# Allegro board ee174tutorial.brd
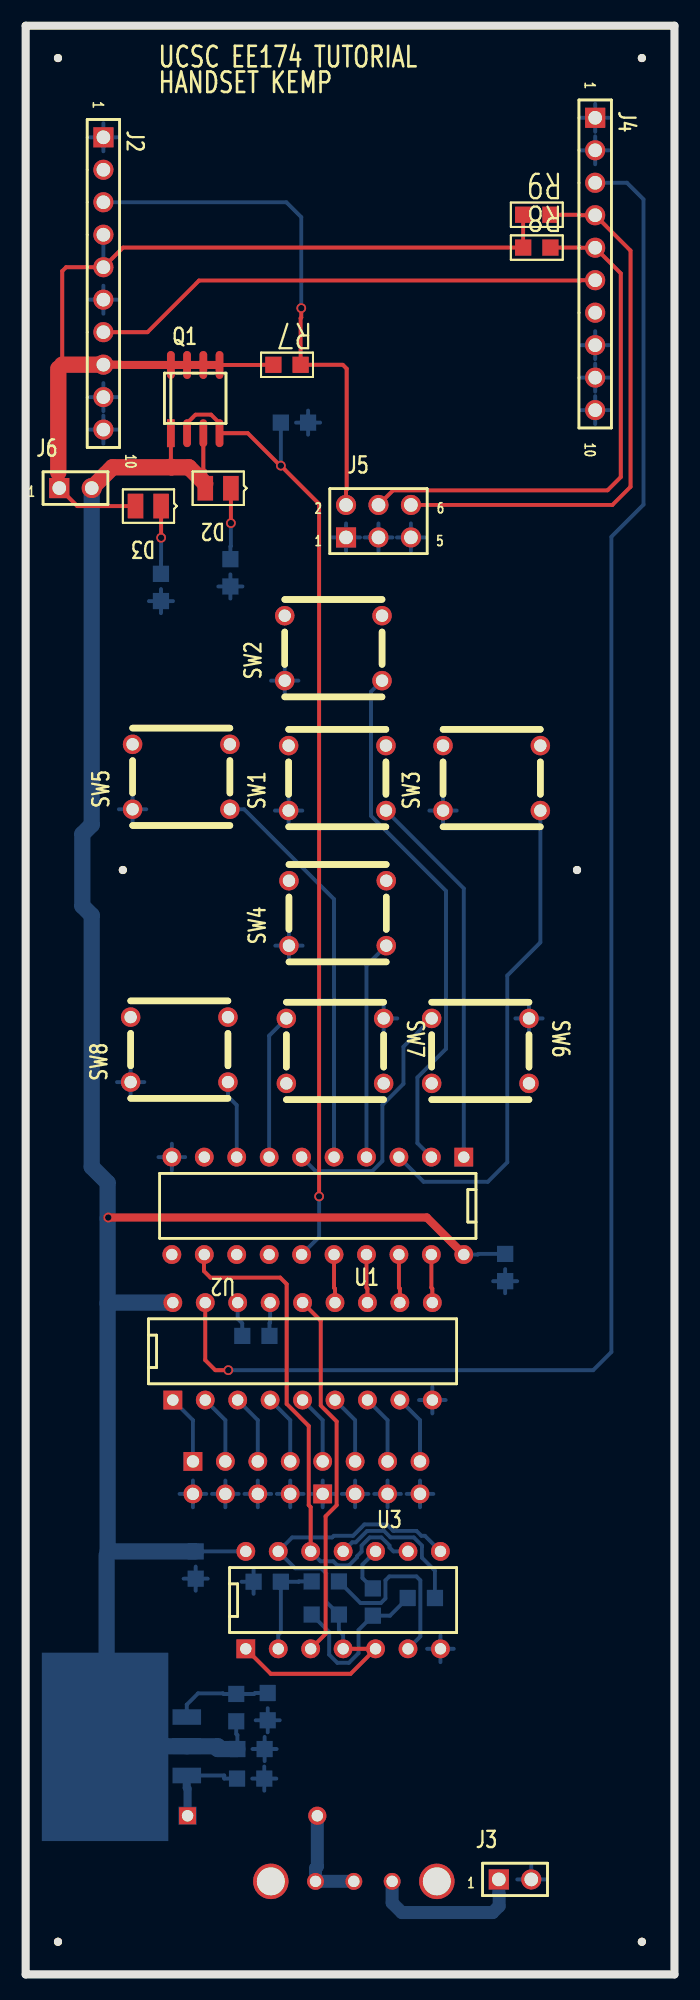
[diagram p0: board, top side]
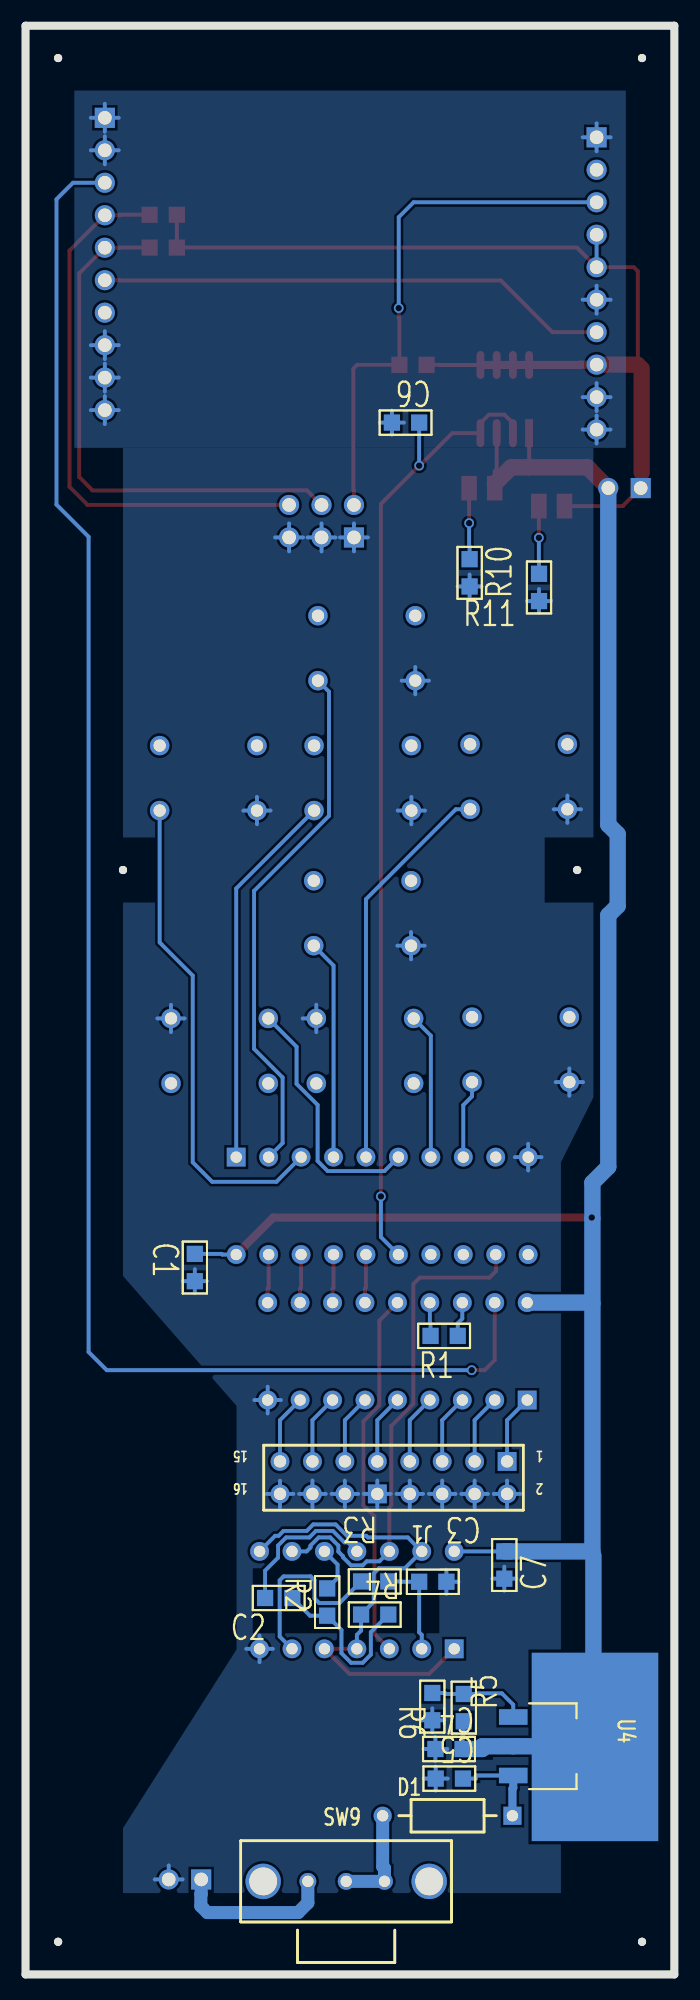
[diagram p1: board, bottom side, seen from below]

Outline 50.81 x 152.41 mm; copper layers: TOP, BOTTOM. Coordinates in mm from the lower left corner of the outline.
Outline path: 0,152.41 0,0.01 50.8,0.01 50.8,152.41 0,152.41 ; 0.01,152.4 0.01,0 50.81,0 50.81,152.4 0.01,152.4

## Placement (name value [footprint] x y rotation side)
C1  0.1uF  [SMC0805]  37.55 56.35 270 bottom
C2  100nF  [SMC0805]  32.05 29.44 180 bottom
C3  0.1uF  [SMC0805]  17.86 30.71 0 bottom
C4  0.1uF  [SMC0805]  16.59 17.63 0 bottom
C5  0.1uF  [SMC0805]  16.56 15.32 0 bottom
C6  10nF  [SMC0805]  19.99 121.36 0 bottom
C7  0.1uF  [SMC0805]  13.32 30.95 90 bottom
D1  1N5818  [AX400_35D]  22.85 12.41 180 bottom
D2  GREEN  [SMD_0805_21]  14.07 116.23 180 top
D3  RED  [SMD_0805_21]  8.61 114.83 180 top
J1  JUMPER8  [BCON_8X2V_100S_1SQ_42D]  13.11 40.12 0 bottom
J2  10Pin 1Row Header  [BCON_10X1V_100S_1SQ_42D]  6.1 143.68 270 top
J3  +9V Battery  [BCON_2X1V_100S_1SQ_42D]  37.06 7.43 0 top
J4  10Pin 1Row Header  [BCON_10X1V_100S_1SQ_42D]  44.6 145.2 270 top
J5  JUMPER3  [BCON_3X2V_100S_42D]  25.1 112.38 0 top
J6  TX Test Jumper  [BCON_2X1V_100S_1SQ_42D]  2.64 116.24 0 top
NOREF  -  [unnamed]  43.18 86.37 180 bottom
NOREF#2  -  [unnamed]  48.26 2.55 180 bottom
NOREF#3  -  [unnamed]  7.62 86.37 180 bottom
NOREF#4  -  [unnamed]  2.54 2.55 180 bottom
NOREF#5  -  [unnamed]  2.54 149.87 180 bottom
NOREF#6  -  [unnamed]  48.26 149.87 180 bottom
Q1  TPS1120  [SOJ50_8_WB150_L150]  11.38 120.54 0 top
R1  1M  [SMR0805]  19.1 49.94 180 bottom
R2  4.7k  [SMR0805]  27.19 30.19 270 bottom
R3  470  [SMR0805]  22.4 30.73 0 bottom
R4  120k  [SMR0805]  22.4 28.14 0 bottom
R5  R  [SMR0805]  18.96 19.88 90 bottom
R6  240  [SMR0805]  16.5 21.93 270 bottom
R7  47k  [SMR0805]  21.54 125.88 180 top
R8  47k  [SMR0805]  41.1 135.05 180 top
R9  47k  [SMR0805]  41.1 137.62 180 top
R10  1k  [SMR0805]  16.04 108.55 90 bottom
R11  1k  [SMR0805]  10.6 109.54 270 bottom
SW1  SW PUSHBUTTON  [B3F-1000_38D]  28.22 91.02 90 top
SW2  SW PUSHBUTTON  [B3F-1000_38D]  27.91 101.18 90 top
SW3  SW PUSHBUTTON  [B3F-1000_38D]  40.31 91.02 90 top
SW4  SW PUSHBUTTON  [B3F-1000_38D]  28.24 80.45 90 top
SW5  SW PUSHBUTTON  [B3F-1000_38D]  16 91.12 90 top
SW6  SW PUSHBUTTON  [B3F-1000_38D]  31.8 74.76 270 top
SW7  SW PUSHBUTTON  [B3F-1000_38D]  20.42 74.76 270 top
SW8  SW PUSHBUTTON  [B3F-1000_38D]  15.85 69.79 90 top
SW9  SW_SL_SPDT  [SPDT_EG1206]  25.7 7.28 180 bottom
U1  HT12E  [DIP100_18_W300_L950]  11.53 44.92 0 top
U2  ATF16V8BQL  [DIP100_20_W300_L975]  34.32 63.92 180 top
U3  74HC00  [DIP100_14_W300_L700]  17.25 25.46 0 top
U4  LM317A/SOT223  [SMSOT223_1234]  12.62 20.13 270 bottom

## Library data of the parts
C1-C7 = C NP_1
D1 = DIODE SCHOTTKY_0
D2 D3 = LED_0
J1 = JUMPER8
J2 J4 = 10Pin 1Row Header
J3 J6 = 2Pin Header_0
J5 = JUMPER3
Q1 = TPS1120_1
R1-R11 = R
SW1-SW8 = SW PUSHBUTTON
SW9 = SW_SL_SPDT_0
U1 = HT12E_4
U2 = ATF16V8BQL_3
U3 = 74HC00_8
U4 = LM317_1

## Footprints (pads in the part's own frame, mm; a bottom-side part is the same pattern mirrored in y, then rotated)
AX400_35D
  round 1.422 hole 0.889: 1(0,0)
  rect 1.321x1.321 hole 0.889: 2(10.16,0)
B3F-1000_38D
  round 1.524 hole 0.965: (5.08,7.62) (5.08,0) 1(0,7.62) 2(0,0)
BCON_2X1V_100S_1SQ_42D
  rect 1.575x1.575 hole 1.067: 1(0,0)
  round 1.575 hole 1.067: 2(2.54,0)
BCON_3X2V_100S_42D
  rect 1.575x1.575 hole 1.067: 1(0,0)
  round 1.575 hole 1.067: 2(0,2.54) 3(2.54,0) 4(2.54,2.54) 5(5.08,0) 6(5.08,2.54)
BCON_8X2V_100S_1SQ_42D
  rect 1.473x1.473 hole 0.965: 1(0,0) 10(10.16,2.54)
  round 1.473 hole 0.965: 2(0,2.54) 3(2.54,0) 4(2.54,2.54) 5(5.08,0) 6(5.08,2.54) 7(7.62,0) 8(7.62,2.54) 9(10.16,0) 11(12.7,0) 12(12.7,2.54) 13(15.24,0) 14(15.24,2.54) 15(17.78,0) 16(17.78,2.54)
BCON_10X1V_100S_1SQ_42D
  rect 1.575x1.575 hole 1.067: 1(0,0)
  round 1.575 hole 1.067: 2(2.54,0) 3(5.08,0) 4(7.62,0) 5(10.16,0) 6(12.7,0) 7(15.24,0) 8(17.78,0) 9(20.32,0) 10(22.86,0)
DIP100_14_W300_L700
  rect 1.473x1.473 hole 0.889: 1(0,0)
  round 1.473 hole 0.889: 2(2.54,0) 3(5.08,0) 4(7.62,0) 5(10.16,0) 6(12.7,0) 7(15.24,0) 8(15.24,7.62) 9(12.7,7.62) 10(10.16,7.62) 11(7.62,7.62) 12(5.08,7.62) 13(2.54,7.62) 14(0,7.62)
DIP100_18_W300_L950
  rect 1.473x1.473 hole 0.889: 1(0,0)
  round 1.473 hole 0.889: 2(2.54,0) 3(5.08,0) 4(7.62,0) 5(10.16,0) 6(12.7,0) 7(15.24,0) 8(17.78,0) 9(20.32,0) 10(20.32,7.62) 11(17.78,7.62) 12(15.24,7.62) 13(12.7,7.62) 14(10.16,7.62) 15(7.62,7.62) 16(5.08,7.62) 17(2.54,7.62) 18(0,7.62)
DIP100_20_W300_L975
  rect 1.473x1.473 hole 0.889: 1(0,0)
  round 1.473 hole 0.889: 2(2.54,0) 3(5.08,0) 4(7.62,0) 5(10.16,0) 6(12.7,0) 7(15.24,0) 8(17.78,0) 9(20.32,0) 10(22.86,0) 11(22.86,7.62) 12(20.32,7.62) 13(17.78,7.62) 14(15.24,7.62) 15(12.7,7.62) 16(10.16,7.62) 17(7.62,7.62) 18(5.08,7.62) 19(2.54,7.62) 20(0,7.62)
SMC0805
  rect 1.27x1.27 smd: 1(0,0) 2(2.134,0)
SMD_0805_21
  rect 1.219x1.93 smd: 1(0,0) 2(-2.007,0)
SMR0805
  rect 1.27x1.27 smd: 1(0,0) 2(2.134,0)
SMSOT223_1234
  rect 1.219x2.235 smd: 1(0,0) 2(2.286,0) 3(4.572,0)
  rect 3.607x2.235 smd: 4(2.286,6.198)
SOJ50_8_WB150_L150
  rect 0.61x2.184 smd: 1(0,0)
  oval 0.61x2.184 smd: 2(1.27,0) 3(2.54,0) 4(3.81,0) 5(3.81,5.334) 6(2.54,5.334) 7(1.27,5.334) 8(0,5.334)
SPDT_EG1206
  round 2.769 hole 2.184: (-6.5,0) (6.5,0)
  round 1.321 hole 0.889: 1(-3,0) 2(0,0) 3(3,0)
unnamed
  round 0.635 hole 3.175 unplated: (0,0)

## Nets
+4.5V: C1.1(A) C4.1(A) C7.2(B) D2.1(ANODE) J6.2 Q1.1(S) Q1.3(S) R6.2(B) U1.18(+4.5V) U2.20(+4.5V) U3.14(+4.5V) U4.2(VOUT1) U4.4(VOUT2)
GND: C1.2(B) C3.1(A) C4.2(B) C5.2(B) C6.2(B) C7.1(A) J1.2 J1.4 J1.6 J1.8 J1.10 J1.12 J1.14 J1.16 J2.1 J2.6 J2.9 J2.10 J3.2 J4.1 J4.2 J4.8 J4.9 J4.10 J5.1 J5.3 J5.5 R5.1(A) R10.1(A) R11.2(B) SW1.1(A) SW2.1(A) SW3.1(A) SW4.1(A) SW5.1(A) SW6.1(A) SW7.1(A) SW8.1(A) U1.9(GND) U2.10(GND) U3.7(GND)
3HZ_CLK: U1.14(TE) U3.3(Y)
ADR0: J1.1 U1.1(A0)
ADR1: J1.3 U1.2(A1)
ADR2: J1.5 U1.3(A2)
ADR3: J1.7 U1.4(A3)
ADR4: J1.9 U1.5(A4)
ADR5: J1.11 U1.6(A5)
ADR6: J1.13 U1.7(A6)
ADR7: J1.15 U1.8(A7)
CLK_ENABLE: U2.12(ENABLE) U3.9(A) U3.12(A)
DATA: J4.3 U1.17(DOUT)
N_TXON: C6.1(A) Q1.2(G) Q1.4(G) U2.15(A)
S1: SW1.2(B) U2.1(I1)
S2: SW2.2(B) U2.2(I2)
S3: SW3.2(B) U2.3(I3)
S4: SW4.2(B) U2.4(I4)
S5: SW5.2(B) U2.5(I5)
S6: SW6.2(B) U2.6(I6)
S7: SW7.2(B) U2.7(I7)
S8: SW8.2(B) U2.8(I8)
N03546: J3.1 SW9.1
N03550: D1.1(ANODE) SW9.2 SW9.3
N03611: C5.1(A) D1.2(CATHODE) U4.3(VIN)
N03633: R5.2(B) R6.1(A) U4.1(ADJ)
N03682: D2.2(CATHODE) R10.2(B)
N03964: C2.2(B) R2.2(B) R4.1(A)
N03982: R4.2(B) U3.1(A) U3.4(A) U3.5(B) U3.8(Y) U3.13(B)
N04113: C3.2(B) R3.1(A) U3.2(B)
N06193: R1.2(B) U1.16(OSC1)
N06197: R1.1(A) U1.15(OSC2)
N11246: U1.10(A) U2.19(D0)
N11250: U1.11(B) U2.18(D1)
N11254: U1.12(C) U2.17(D2)
N11258: U1.13(D) U2.16(D3)
N11605: D3.1(ANODE) J2.4 J2.5 J2.8 J6.1 Q1.5(D2) Q1.6(D1) Q1.7(D2) Q1.8(D1) R7.2(B) R8.2(B) R9.2(B)
N11612: D3.2(CATHODE) R11.1(A)
N13941: J2.3 J5.2 R7.1(A)
N15925: J2.7 J4.6
N16601: J4.5 J5.4 R8.1(A)
N16605: J4.4 J5.6 R9.1(A)
N35450: R2.1(A) U3.10(B)
N35896: R3.2(B) U3.6(Y)
N35975: C2.1(A) U3.11(Y)

Pads without a net: J2 2; J4 7; U2 9 11 13 14

## Via types
v1: diameter 0.762, hole 0.508, TOP to BOTTOM, 7 vias

## Routing (per net, layer and track width the routed paths; a pad name or vN(x,y) marks a point on that pad's centre or on a via; arc(x,y) is an arc through that point)
+4.5V: length 169.7
  TOP w0.305: D2.1 14.07,117.55 13.92,117.7 Q1.3 ; Q1.1 11.38,117.92
  TOP w0.635: v1(6.48,59.19) 31.42,59.19 U2.20
  TOP w1.27: 11.43,117.87 6.81,117.87 J6.2 ; 11.43,117.87 11.38,117.92 ; 11.43,117.87 12.79,117.87 14.07,116.59
  BOTTOM w0.305: R6.2 16.5,18.81 16.59,18.72 C4.1 ; v1(6.48,59.19) 6.48,59.17 6.43,59.12 ; U2.20 35.41,56.3 35.46,56.35 C1.1 ; 6.35,32.78 6.65,33.08 ; U3.14 C7.2 ; U4.4 6.43,17.16
  BOTTOM w1.27: 6.35,22.87 6.35,32.78 ; 6.43,52.48 6.43,33.08 C7.2 ; 6.43,52.48 6.43,61.91 5.18,63.16 5.18,82.83 4.45,83.57 4.45,89.18 5.18,89.91 J6.2 ; 6.43,52.48 6.48,52.54 U1.18 ; C4.1 15.05,17.63 15.05,17.84 U4.2 10.16,17.84
GND: length 167.9
  BOTTOM w0.305: 30.81,44.92 U1.9 ; U1.9 31.85,45.96 ; U1.9 32.9,44.92 ; U1.9 31.85,43.88 ; 28.04,73.7 SW7.1 ; SW7.1 29.11,74.76 ; SW7.1 28.04,75.83 ; 44.6,123.78 J4.9 ; J4.9 43.51,124.88 ; J4.9 45.7,124.88 ; J4.9 44.6,125.97 ; 24.76,37.58 J1.12 ; J1.12 25.81,38.62 ; J1.12 25.81,36.54 ; J1.12 26.85,37.58 ; J1.10 24.31,37.58 ; J1.10 23.27,38.62 ; J1.10 22.22,37.58 ; J1.10 23.27,36.54 ; J2.10 7.19,120.82 ; J2.10 5,120.82 ; J2.10 6.1,121.91 ; J2.10 6.1,119.72 ; J2.6 7.19,130.98 ; J2.6 5,130.98 ; J2.6 6.1,132.07 ; J2.6 6.1,129.88 ; 5,123.36 J2.9 ; J2.9 6.1,124.45 ; J2.9 6.1,122.26 ; J2.9 7.19,123.36 ; 43.51,142.66 J4.2 ; J4.2 44.6,143.75 ; J4.2 44.6,141.56 ; J4.2 45.7,142.66 ; 7.16,69.79 SW8.1 ; SW8.1 9.3,69.79 ; SW8.1 8.23,68.72 ; SW8.1 8.23,70.86 ; C5.2 19.64,15.32 ; C5.2 18.69,16.26 ; C5.2 18.69,14.37 ; C5.2 17.75,15.32 ; C3.1 17.86,31.65 ; C3.1 16.91,30.71 ; C3.1 17.86,29.77 ; 31.62,91.02 SW3.1 ; SW3.1 33.76,91.02 ; SW3.1 32.69,89.95 ; SW3.1 32.69,92.09 ; SW5.1 8.38,92.19 ; SW5.1 8.38,90.05 ; SW5.1 7.31,91.12 ; SW5.1 9.45,91.12 ; 20.6,89.95 SW1.1 ; SW1.1 20.6,92.09 ; SW1.1 21.67,91.02 ; SW1.1 19.53,91.02 ; 11.46,62.88 U2.10 ; U2.10 10.41,63.92 ; U2.10 11.46,64.96 ; U2.10 12.5,63.92 ; C4.2 18.72,18.57 ; C4.2 18.72,16.69 ; C4.2 17.78,17.63 ; C4.2 19.66,17.63 ; C7.1 13.32,31.89 ; C7.1 13.32,30.01 ; C7.1 14.26,30.95 ; C7.1 12.38,30.95 ; 38.35,74.76 SW6.1 ; SW6.1 39.42,73.7 ; SW6.1 40.49,74.76 ; SW6.1 39.42,75.83 ; R5.1 18.96,20.82 ; R5.1 18.96,18.93 ; R5.1 18.02,19.88 ; R5.1 19.9,19.88 ; 22.12,120.42 C6.2 ; C6.2 23.07,121.36 ; C6.2 22.12,122.3 ; C6.2 21.18,121.36 ; 13.11,36.54 J1.2 ; J1.2 12.06,37.58 ; J1.2 14.15,37.58 ; J1.2 13.11,38.62 ; 20.73,36.54 J1.8 ; J1.8 19.68,37.58 ; J1.8 21.77,37.58 ; J1.8 20.73,38.62 ; 30.89,36.54 J1.16 ; J1.16 31.93,37.58 ; J1.16 30.89,38.62 ; J1.16 29.84,37.58 ; J5.3 28.73,112.38 ; J5.3 27.64,111.29 ; J5.3 26.54,112.38 ; J5.3 27.64,113.48 ; SW2.1 21.36,101.18 ; SW2.1 19.23,101.18 ; SW2.1 20.29,100.11 ; SW2.1 20.29,102.25 ; 44.6,144.1 J4.1 ; J4.1 44.6,146.29 ; J4.1 45.7,145.2 ; J4.1 43.51,145.2 ; 31.44,25.46 U3.7 ; U3.7 33.53,25.46 ; U3.7 32.49,26.51 ; U3.7 32.49,24.42 ; J4.8 45.7,127.42 ; J4.8 44.6,126.32 ; J4.8 43.51,127.42 ; J4.8 44.6,128.51 ; 10.6,106.46 R11.2 ; R11.2 11.55,107.4 ; R11.2 9.66,107.4 ; R11.2 10.6,108.35 ; J2.1 6.1,144.77 ; J2.1 6.1,142.58 ; J2.1 7.19,143.68 ; J2.1 5,143.68 ; 37.55,53.27 C1.2 ; C1.2 38.5,54.22 ; C1.2 37.55,55.16 ; C1.2 36.61,54.22 ; 18.19,36.54 J1.6 ; J1.6 19.23,37.58 ; J1.6 18.19,38.62 ; J1.6 17.14,37.58 ; J4.10 44.6,123.43 ; J4.10 43.51,122.34 ; J4.10 45.7,122.34 ; J4.10 44.6,121.24 ; 15.65,36.54 J1.4 ; J1.4 14.6,37.58 ; J1.4 16.69,37.58 ; J1.4 15.65,38.62 ; 29.08,112.38 J5.5 ; J5.5 30.18,113.48 ; J5.5 30.18,111.29 ; J5.5 31.27,112.38 ; 28.35,36.54 J1.14 ; J1.14 29.39,37.58 ; J1.14 28.35,38.62 ; J1.14 27.3,37.58 ; 19.56,80.45 SW4.1 ; SW4.1 21.69,80.45 ; SW4.1 20.62,81.52 ; SW4.1 20.62,79.39 ; 15.1,108.55 R10.1 ; R10.1 16.04,109.49 ; R10.1 16.04,107.6 ; R10.1 16.98,108.55 ; J3.2 39.6,8.52 ; J3.2 38.5,7.43 ; J3.2 40.69,7.43 ; 25.1,111.29 J5.1 ; J5.1 26.19,112.38 ; J5.1 25.1,113.48 ; J5.1 24,112.38
3HZ_CLK: length 29
  TOP w0.305: U3.3 23.5,26.63 23.5,35.83 24.36,36.7 24.36,43.25 23.11,44.49 23.11,51.12 U1.14
ADR0: length 5.5
  BOTTOM w0.305: J1.1 13.11,43.35 U1.1
ADR1: length 5.5
  BOTTOM w0.305: J1.3 15.65,43.35 U1.2
ADR2: length 5.5
  BOTTOM w0.305: U1.3 18.19,43.35 J1.5
ADR3: length 5.5
  BOTTOM w0.305: U1.4 20.73,43.35 J1.7
ADR4: length 5.5
  BOTTOM w0.305: U1.5 23.27,43.35 J1.9
ADR5: length 5.5
  BOTTOM w0.305: U1.6 25.81,43.35 J1.11
ADR6: length 5.5
  BOTTOM w0.305: J1.13 28.35,43.35 U1.7
ADR7: length 5.5
  BOTTOM w0.305: J1.15 30.89,43.35 U1.8
CLK_ENABLE: length 39.7
  TOP w0.305: U2.12 13.97,56.27 13.97,55 14.48,54.5 19.94,54.5 20.45,53.99 20.45,44.62 22.17,42.89 22.17,36.7 22.33,36.54 U3.12
  BOTTOM w0.305: U3.9 28.8,33.08 28.5,33.39 28.5,33.54 27.86,34.18 26.95,34.18 26.31,33.54 26.31,33.07 25.96,32.71 25.96,32.63 25.32,31.99 24.41,31.99 24.09,32.31 23.1,32.31 U3.12
DATA: length 132.7
  TOP w0.305: U1.17 14.07,48.04 14.86,47.26 v1(15.88,47.26)
  BOTTOM w0.305: v1(15.88,47.26) 44.45,47.26 45.87,48.68 45.87,112.43 48.39,114.95 48.39,138.82 47.09,140.12 J4.3
N_TXON: length 77.4
  TOP w0.305: v1(22.99,60.85) 22.99,115 v1(19.99,118) 19.91,118.07 19.86,118.07 17.4,120.54 Q1.4 15.19,121.32 14.53,121.98 13.31,121.98 12.65,121.32 Q1.2
  BOTTOM w0.305: v1(22.99,60.85) 22.99,57.67 U2.15 ; C6.1 v1(19.99,118)
S1: length 29.6
  BOTTOM w0.305: SW1.2 34.32,84.92 U2.1
S2: length 41.4
  BOTTOM w0.305: SW2.2 27.05,100.32 27.05,90.61 32.92,84.74 32.92,72.38 30.68,70.15 30.68,65.01 U2.2
S3: length 38.5
  BOTTOM w0.305: SW3.2 40.31,80.71 37.72,78.12 37.72,63.51 36.2,61.99 31.17,61.99 U2.3
S4: length 17.2
  BOTTOM w0.305: SW4.2 26.7,78.91 U2.4
S5: length 31.2
  BOTTOM w0.305: U2.5 24.16,84.09 17.12,91.12 SW5.2
S6: length 19.9
  BOTTOM w0.305: U2.6 22.71,62.83 27.15,62.83 27.94,63.62 27.94,68 29.59,69.65 29.59,72.56 SW6.2
S7: length 11.4
  BOTTOM w0.305: U2.7 19.08,73.42 SW7.2
S8: length 6.2
  BOTTOM w0.305: SW8.2 15.85,68.67 16.54,67.98 U2.8
N03546: length 12.7
  BOTTOM w1.016: J3.1 37.06,6.29 37.08,6.26 37.08,5.35 36.58,4.84 29.46,4.84 28.7,5.6 SW9.1
N03550: length 8.2
  BOTTOM w1.016: SW9.2 SW9.3 22.71,8.29 22.85,8.44 D1.1
N03611: length 7.4
  BOTTOM w0.305: C5.1 15.56,15.32 15.56,15.56 U4.3
  BOTTOM w0.635: D1.2 12.69,14.53 12.62,14.59 U4.3
N03633: length 7.7
  BOTTOM w0.305: U4.1 12.62,21.09 13.51,21.98 15.46,21.98 15.51,21.93 R6.1 17.89,21.93 17.97,22.01 R5.2
N03682: length 5.6
  TOP w0.305: D2.2 v1(16.08,113.5)
  BOTTOM w0.305: R10.2 16.04,111.67 16.08,111.71 v1(16.08,113.5)
N03964: length 13.3
  BOTTOM w0.305: R4.1 23.77,26.77 23.77,25.01 24.41,24.37 25.32,24.37 26.07,25.12 26.07,26.94 R2.2 28.54,28.05 C2.2
N03982: length 39.7
  TOP w0.305: U3.1 19.2,23.51 25.45,23.51 U3.5 U3.4
  BOTTOM w0.305: U3.4 24.87,26.56 24.54,26.89 R4.2 23.55,29.13 23.55,31.36 23.15,31.76 21.11,31.76 U3.13 20.88,34.18 24,34.18 24.13,34.3 25.64,34.3 26.53,35.19 28.28,35.19 28.79,34.68 30.61,34.68 30.99,34.3 31.27,34.3 U3.8
N04113: length 7.8
  BOTTOM w0.305: U3.2 19.79,26.56 19.99,26.76 C3.2 21.39,30.71 21.41,30.73 R3.1
N06193: length 2.8
  BOTTOM w0.305: U1.16 16.61,51.28 16.97,50.93 R1.2
N06197: length 2.6
  BOTTOM w0.305: U1.15 19.15,50.98 19.1,50.93 R1.1
N11246: length 3.8
  TOP w0.305: U1.10 31.85,53.63 31.78,53.71 U2.19
N11250: length 3.8
  TOP w0.305: U2.18 29.24,53.71 29.31,53.63 U1.11
N11254: length 3.8
  TOP w0.305: U1.12 26.77,53.63 26.7,53.71 U2.17
N11258: length 3.8
  TOP w0.305: U1.13 24.23,53.63 24.16,53.71 U2.16
N11605: length 82.2
  TOP w0.305: R9.2 R8.2 7.63,135.05 J2.5 3.17,133.52 2.87,133.21 2.87,125.9 2.57,125.59 ; D3.1 4.05,114.83 J6.1 2.64,117.39 2.57,117.46 ; Q1.5 18.4,125.87 18.41,125.88 R7.2
  TOP w0.635: J2.8 7.41,125.9 7.43,125.87 Q1.8 Q1.7 Q1.6 Q1.5
  TOP w1.27: J2.8 2.87,125.9 ; 2.57,125.59 2.57,117.46
  BOTTOM w0.305: J2.4 J2.5
N11612: length 5.3
  TOP w0.305: D3.2 v1(10.62,112.36)
  BOTTOM w0.305: R11.1 10.6,110.53 10.62,110.54 v1(10.62,112.36)
N13941: length 42
  TOP w0.305: v1(21.59,130.31) 21.59,129.58 21.54,129.53 R7.1 24.84,125.88 25.15,125.58 25.15,116.12 25.1,116.07 J5.2
  BOTTOM w0.305: J2.3 20.42,138.6 21.59,137.43 v1(21.59,130.31)
N15925: length 40.2
  TOP w0.305: J2.7 9.55,128.44 13.59,132.47 43.43,132.47 43.46,132.5 J4.6
N16601: length 42.2
  TOP w0.305: R8.1 43.45,135.05 43.46,135.04 J4.5 46.61,133.03 46.61,117.11 45.57,116.07 28.78,116.07 J5.4
N16605: length 43.7
  TOP w0.305: R9.1 43.42,137.62 43.46,137.58 J4.4 47.37,134.81 47.37,116.34 45.95,114.92 J5.6
N35450: length 3.7
  BOTTOM w0.305: U3.10 26.38,32.05 26.38,31 R2.1
N35896: length 14.7
  BOTTOM w0.305: U3.6 30.91,26.43 30.91,30.82 30.61,31.13 28.49,31.13 28.18,30.82 28.18,29.41 27.82,29.04 26.23,29.04 R3.2
N35975: length 11.8
  BOTTOM w0.305: U3.11 25.58,33.79 25.85,33.79 26.74,34.68 28.07,34.68 28.58,34.18 30.4,34.18 31.04,33.54 31.04,32.59 32.05,31.57 C2.1

## Copper pours and planes (outline as drawn; the poured copper is in the pictures)
+4.5V on BOTTOM (solid shape): 11.18,10.43 1.27,10.43 1.27,25.16 11.18,25.16
GND on BOTTOM: 3.81,147.33 3.81,119.39 46.99,119.39 46.99,147.33
GND on BOTTOM: 6.35,119.39 6.35,68.59 8.89,63.51 8.89,25.41 11.43,25.41 11.43,10.17 8.89,10.17 8.89,6.36 43.18,6.36 43.18,11.44 34.29,25.41 34.29,44.46 43.18,54.62 43.18,119.39 ; 4 cut-outs

## Text on the board
BOTTOM: BOT
Board Geometry/Soldermask Bottom: SMB
Ref Des/Silkscreen Bottom: SSB
TOP: TOP
Board Geometry/Soldermask Top: SMT
Ref Des/Silkscreen Top: 6 | SST | UCSC EE174 TUTORIAL | HANDSET KEMP
NCLEGEND-1-2: FIGURE | SIZE | 20.0 | 35.0 | 38.0 | 42.0 | 86.0 | 125.0 | DRILL CHART: TOP to BOTTOM | ALL UNITS ARE IN MILS | PLATED | NON-PLATED | QTY | 7 | 57 | 48 | 30 | 2 | 6
User.6: MECH
